# Altium PCB ST-LINK V2-1.PcbDoc
Units mm, origin at the board's own origin, x right, y up, seen from the top; angles counter-clockwise.
Board outline 110.74 x 103.38 mm, 2 copper layers (Top Layer, Bottom Layer); 71 components, 59 nets, 207 pads, 50 vias.
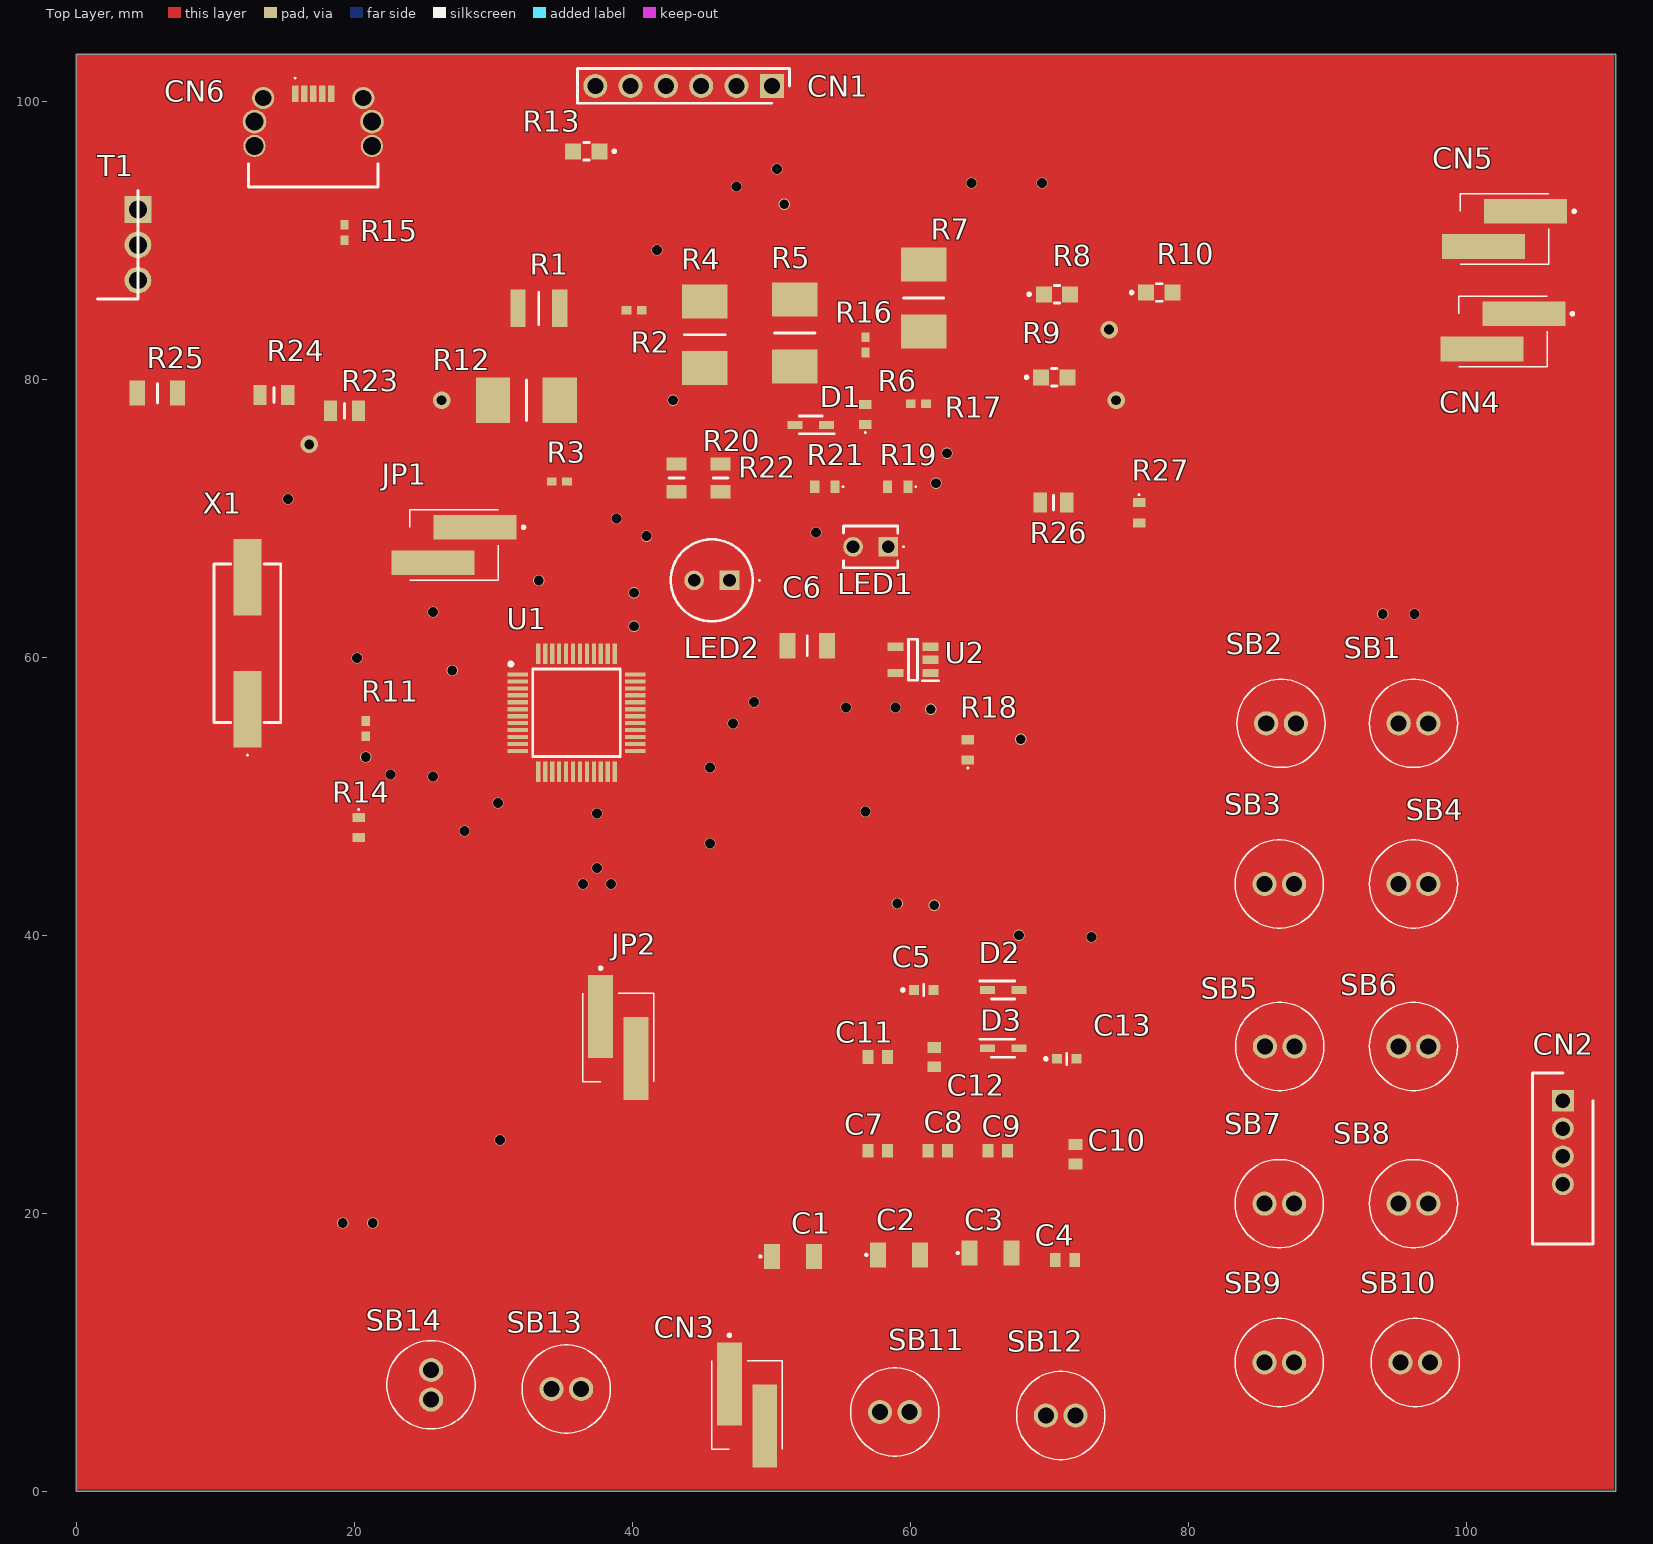
[diagram p0: Top Layer view]
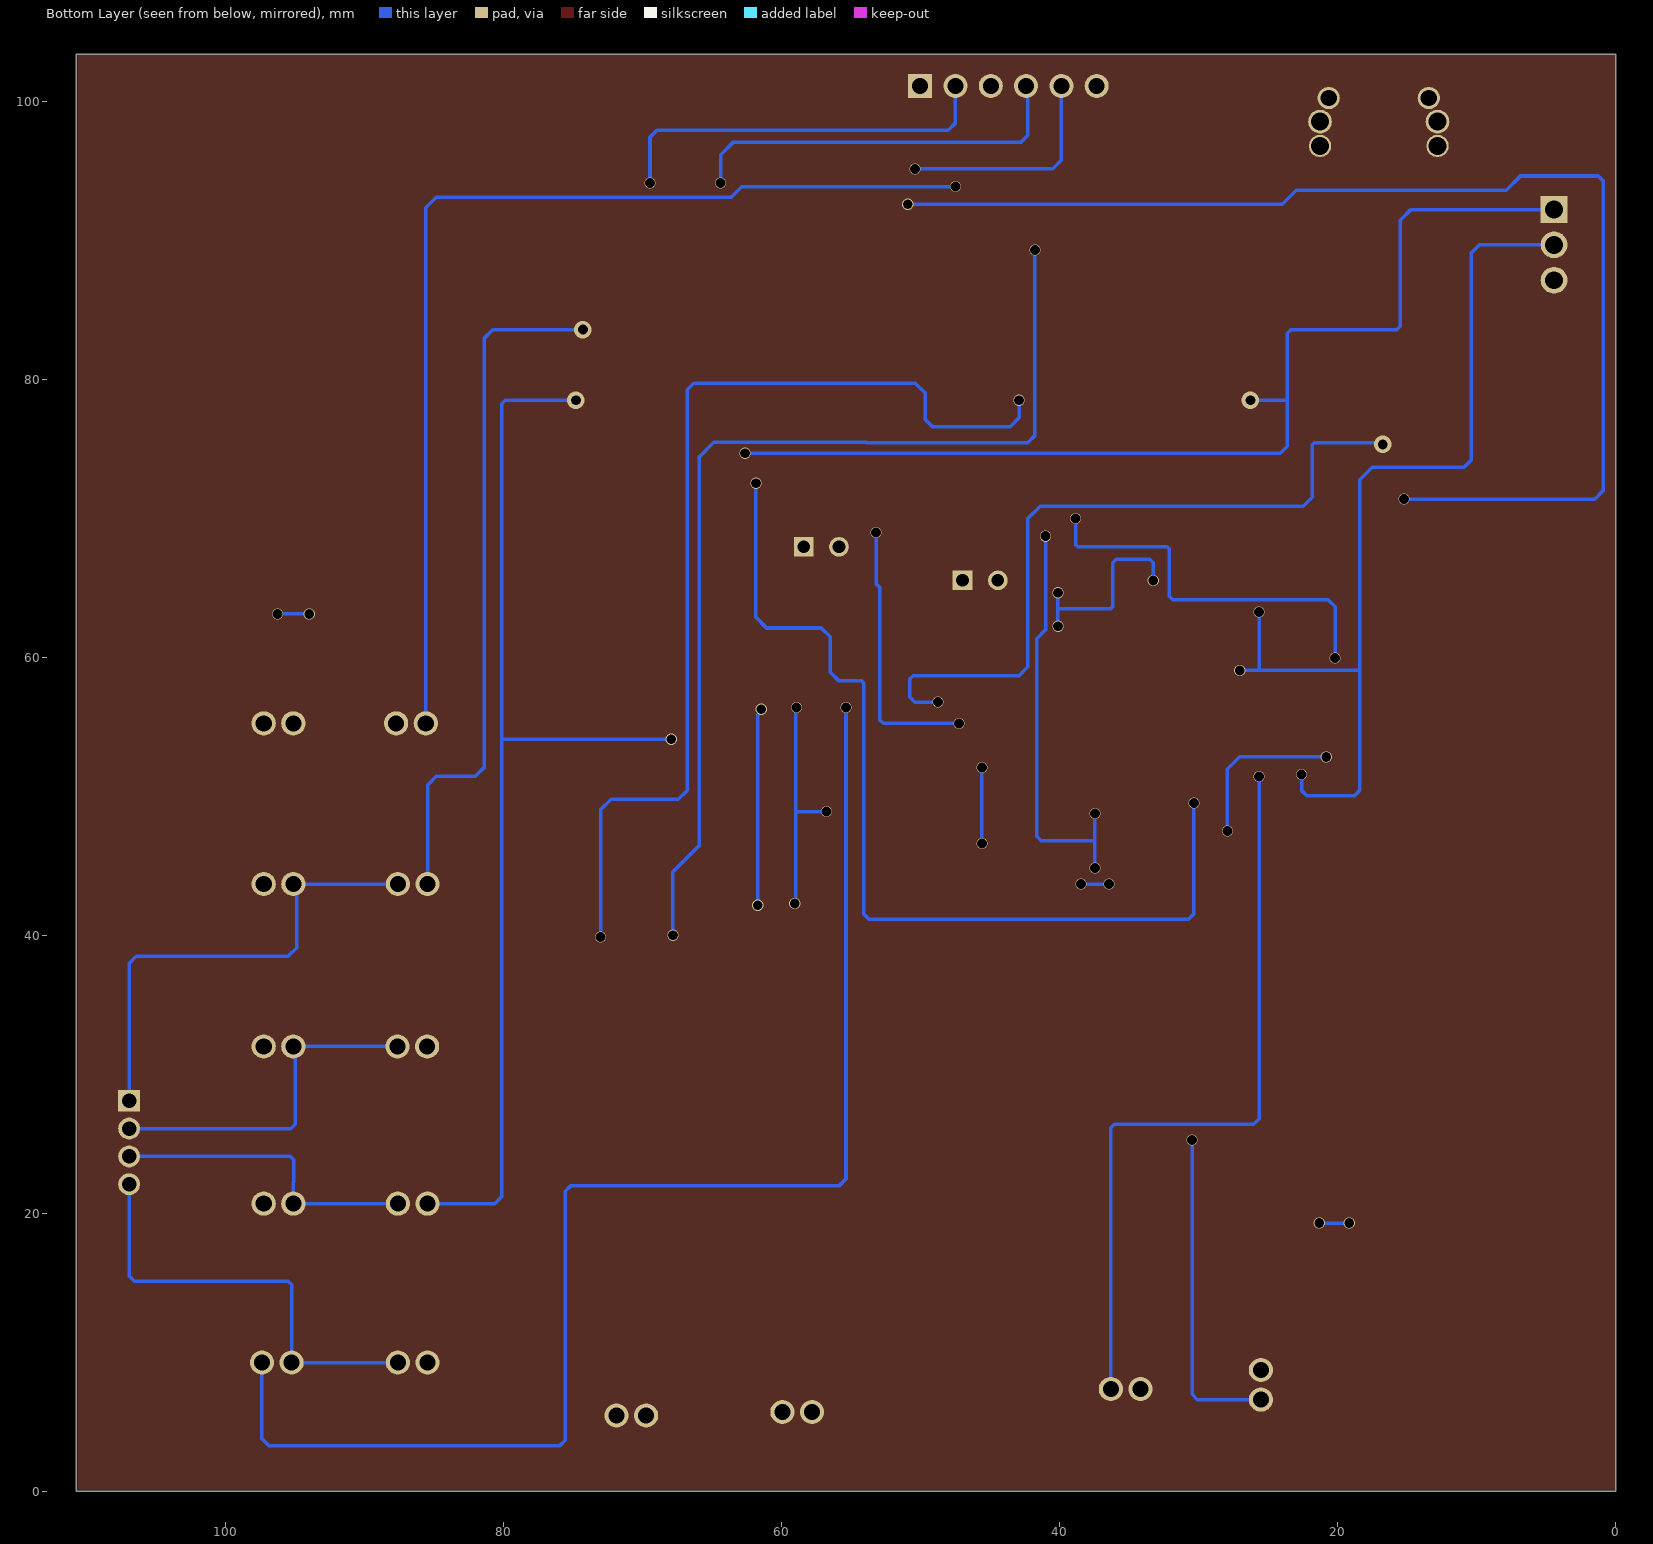
[diagram p1: Bottom Layer view, seen from below]
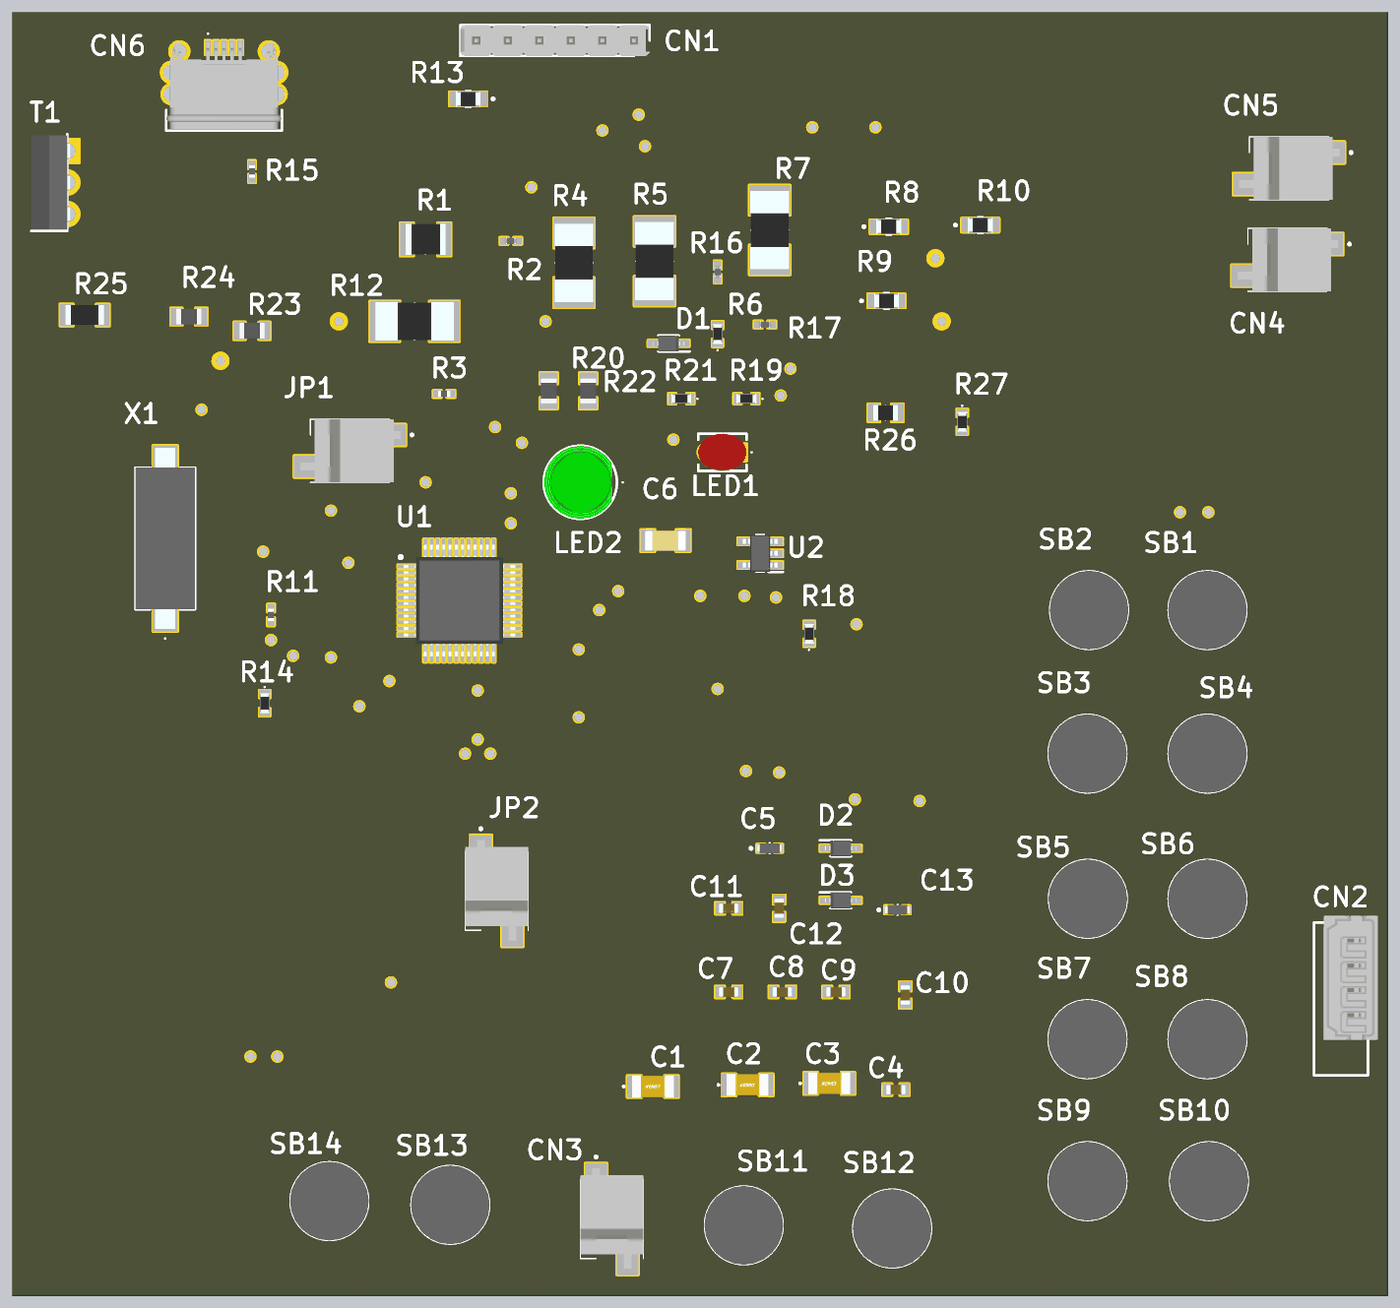
[diagram p2: 3D render of the assembled board from above, using the file's embedded part models]

## Layer stack, top to bottom
Top Solder: solder mask 0.0102, Solder Resist, Dk 3.5
Top Layer: signal copper 0.0356
Dielectric 1: dielectric 0.32, FR-4, Dk 4.8
Bottom Layer: signal copper 0.0356
Bottom Solder: solder mask 0.0102, Solder Resist, Dk 3.5

## Board outline
0,0 0,103.378 110.744,103.378 110.744,0

## Design rules (kind name [scope] priority, off if disabled: settings)
Clearance [All] p1: gap=0.254 ignorepadtopadclearanceinfootprint=FALSE
PolygonConnect [All] p1: connectstyle=Relief reliefconductorwidth=0.254 reliefentries=4 polygonreliefangle="90 Angle" airgapwidth=0.254
RoutingVias [All] p1: holewidth=0.711 width=1.27 viastyle="Through Hole" minholewidth=0.711 minwidth=1.27 maxholewidth=0.711 maxwidth=1.27
SolderMaskExpansion [All] p1: expansion=0.102 istentingtop=FALSE
Width [All] p1: maxlimit=0.254 minlimit=0.254 preferedwidth=0.254
30 further rules are at their usual default settings.

## Components (designator, comment, footprint, x,y, rotation, side; value= is the part's Value field where it differs from the comment)
C1 "C1206C200KCGACTU" C1206 51.562,16.891 r0 top
C2 "C1206C200KCGACTU" C1206 59.182,17.018 r0 top
C3 "C1206C200KCGACTU" C1206 65.762,17.145 r0 top
C4 "06035C104K4T4A" CAPC1608X90N 71.12,16.637 r0 top
C5 "MAJCT168BB7105KTEA01" MAJx16 60.96,36.068 r0 top
C6 "KGM31GCG2J103JU" CAPC3316X145N 52.578,60.833 r0 top
C7 "06035C104K4T4A" CAPC1608X90N 57.658,24.511 r0 top
C8 "06035C104K4T4A" CAPC1608X90N 61.976,24.511 r0 top
C9 "06035C104K4T4A" CAPC1608X90N 66.294,24.511 r0 top
C10 "06035C104K4T4A" CAPC1608X90N 71.882,24.257 r90 top
C11 "06035C104K4T4A" CAPC1608X90N 57.658,31.242 r0 top
C12 "06035C104K4T4A" CAPC1608X90N 61.722,31.242 r90 top
C13 "MAJCT168BB7105KTEA01" MAJx16 71.247,31.115 r0 top
CN1 "22-28-4062" HDRV6W66P0X254_1X6_1524X249X838P 50.038,101.092 r180 top
CN2 "53014-0410" SHDR4W60P0X200_1X4_1200X435X1000P 106.934,28.098 r90 top
CN3 "3-647166-2" 36471662 48.26,6.223 r180 top
CN4 "3-647166-2" 36471662 102.62,83.439 r90 top
CN5 "3-647166-2" 36471662 102.743,90.805 r90 top
CN6 "204926-1103" 2049261103 17.052,97.299 r0 top
D1 "BAT60JFILM" SOD2513X117N 52.832,76.708 r180 top
D2 "BAT60JFILM" SOD2513X117N 66.675,36.068 r0 top
D3 "BAT60JFILM" SOD2513X117N 66.675,31.877 r0 top
JP1 "3-647166-2" 36471662 27.178,68.072 r90 top
JP2 "3-647166-2" 36471662 38.989,32.643 r180 top
LED1 "C4SMA-RGY-CS4V1BB1" C4SMARGYCS4V1BB1 58.42,67.945 r180 top
LED2 "TLHG5420-ASZ" TLHG5420ASZ 46.99,65.532 r0 top
R1 "CRCW12102K70FKEAHP" RESC3225X70N 33.274,85.09 r0 top
R2 "MCS04020D4701BE000" RESC1005X37N 40.132,84.963 r0 top
R3 "SFR01MZPF1003" RESC1005X40N 34.756,72.644 r0 top
R4 "CRM2512QJW-103ELF" RESC6331X80N 45.212,83.198 r270 top
R5 "CRM2512QJW-103ELF" RESC6331X80N 51.689,83.325 r90 top
R6 "ERA-3AED101V" ERA3AEB101V 56.769,77.47 r90 top
R7 "CRM2512QJW-103ELF" RESC6331X80N 60.96,85.839 r90 top
R8 "ERA-6AHD220V" ERA6AEB1020V 70.546,86.106 r0 top
R9 "ERA-6AHD220V" ERA6AEB1020V 70.358,80.137 r0 top
R10 "ERA-6AHD220V" ERA6AEB1020V 77.912,86.233 r0 top
R11 "SFR01MZPF1003" RESC1005X40N 20.828,54.864 r270 top
R12 "CRM2512QJW-103ELF" RESC6331X80N 32.385,78.486 r180 top
R13 "ERA-6AHD220V" ERA6AEB1020V 36.703,96.393 r180 top
R14 "ERA-3AED101V" ERA3AEB101V 20.32,47.752 r270 top
R15 "SFR01MZPF1003" RESC1005X40N 19.304,90.551 r270 top
R16 "MCS04020D4701BE000" RESC1005X37N 56.769,82.465 r270 top
R17 "MCS04020D4701BE000" RESC1005X37N 60.579,78.232 r180 top
R18 "ERA-3AED101V" ERA3AEB101V 64.135,53.34 r90 top
R19 "ERA-3AED101V" ERA3AEB101V 59.092,72.263 r180 top
R20 "WSL080500000ZEA9" RESC2013X84N 43.18,72.898 r90 top
R21 "ERA-3AED101V" ERA3AEB101V 53.848,72.263 r180 top
R22 "WSL080500000ZEA9" RESC2013X84N 46.355,72.898 r90 top
R23 "WSL080500000ZEA9" RESC2013X84N 19.304,77.724 r0 top
R24 "WSL080500000ZEA9" RESC2013X84N 14.224,78.867 r0 top
R25 "CRCW12061K50FKEAHP" RESC3116X65N 5.842,78.994 r180 top
R26 "TNPW080536K0BEEA" RESC2012X55N 70.297,71.12 r0 top
R27 "ERA-3AED101V" ERA3AEB101V 76.454,70.395 r270 top
SB1 "8631CQD2" 8631CQD2 95.123,55.245 r0 top
SB2 "8631CQD2" 8631CQD2 85.598,55.245 r0 top
SB3 "8631CQD2" 8631CQD2 85.471,43.688 r0 top
SB4 "8631CQD2" 8631CQD2 95.123,43.688 r0 top
SB5 "8631CQD2" 8631CQD2 85.5,32.004 r0 top
SB6 "8631CQD2" 8631CQD2 95.123,32.004 r0 top
SB7 "8631CQD2" 8631CQD2 85.471,20.701 r0 top
SB8 "8631CQD2" 8631CQD2 95.123,20.701 r0 top
SB9 "8631CQD2" 8631CQD2 85.471,9.271 r0 top
SB10 "8631CQD2" 8631CQD2 95.25,9.271 r0 top
SB11 "8631CQD2" 8631CQD2 57.814,5.715 r0 top
SB12 "8631CQD2" 8631CQD2 69.752,5.461 r0 top
SB13 "8631CQD2" 8631CQD2 34.192,7.366 r0 top
SB14 "8631CQD2" 8631CQD2 25.527,8.734 r270 top
T1 "BD139" TO254P290X760X1320-3P 4.445,92.202 r270 top
U1 "STM32F103CBT6" QFP50P900X900X160-48N 35.988,56.011 r0 top
U2 "LD3985M33R" SOT95P280X145-5N 60.198,59.817 r180 top
X1 "ECS-80-12-5PX-GM-TR" ECS80125PXGMTR 12.319,61.011 r90 top

## Footprints (in the part's own frame and the unit in brackets; to place one, negate y for a bottom-side part, rotate by r counter-clockwise, add the part's x,y. Pads: shape width x height; smd on the part's side, far side on the other; paste and mask are expansions set on the pad)
8631CQD2 [mm]
  round 1.74 hole 1.16: 1(0,0) 2(2.13,0)
  silkscreen extent -2.11,-3.17 4.24,3.17, body extent -2.11,-3.17 4.24,3.17, height 14.03
36471662 [mm]
  rect 1.78x5.97 smd: 1(1.27,-1.52) 2(-1.27,1.52)
  silkscreen extent -2.54,-5.1 2.54,3.18, body extent -2.54,-4.08 2.54,4, height 10.55
2049261103 [mm]
  rect 0.45x1.2 smd: 1(-1.3,3.225) 2(-0.65,3.225) 3(0,3.225) 4(0.65,3.225) 5(1.3,3.225)
  round 1.6 hole 1.17: MH1(-3.6,2.925) MH2(3.6,2.925)
  round 1.7 hole 1.3: MH3(-4.225,1.225) MH4(4.225,1.225)
  round 1.6 hole 1.3: MH5(-4.225,-0.525) MH6(4.225,-0.525)
  silkscreen extent -4.65,-3.47 4.65,4.4, body extent -4.65,-3.32 4.65,3.68, height 3.83
C4SMARGYCS4V1BB1 [mm]
  rect 1.416x1.416 hole 0.91: 1(0,0)
  round 1.416 hole 0.91: 2(2.54,0)
  silkscreen extent -1.13,-1.5 3.22,1.5, body extent -0.68,-1.5 3.22,1.5, height 10.14
C1206 [mm]
  rect 1.15x1.8 smd: 1(-1.5,0) 2(1.5,0)
  silkscreen extent -2.4,-0.05 -2.3,0.05, body extent -1.7,-0.9 1.7,0.9, height 1.75
CAPC1608X90N [mm]
  rect 0.78x0.99 smd: 1(-0.7,0) 2(0.7,0)
  body extent -0.8,-0.41 0.8,0.41, height 0.9
CAPC3316X145N [mm]
  rect 1.17x1.82 smd: 1(-1.42,0) 2(1.42,0)
  silkscreen extent 0,-0.7 0,0.7, body extent -1.65,-0.8 1.65,0.8, height 1.68
ECS80125PXGMTR [mm]
  rect 5.5x2 smd: 1(-4.75,0) 2(4.75,0)
  silkscreen extent -8.1,-2.4 5.7,2.4, body extent -7.3,-2.4 7.3,2.4, height 4.4
ERA3AEB101V [mm]
  rect 0.65x0.9 smd: 1(-0.725,0) 2(0.725,0)
  silkscreen extent -1.35,-0.05 -1.25,0.05, body extent -0.8,-0.4 0.8,0.4, height 0.45
ERA6AEB1020V [mm]
  rect 1.15x1.15 smd: 1(-0.95,0) 2(0.95,0)
  silkscreen extent -2.1,-0.63 0.2,0.63, body extent -1,-0.63 1,0.63, height 0.5
HDRV6W66P0X254_1X6_1524X249X838P [mm]
  rect 1.725x1.725 hole 1.15: 1(0,0)
  round 1.725 hole 1.15: 2(2.54,0) 3(5.08,0) 4(7.62,0) 5(10.16,0) 6(12.7,0)
  silkscreen extent -1.27,-1.24 13.97,1.24, body extent -1.27,-1.24 13.97,1.24, height 9.65
MAJx16 [mm]
  rect 0.7x0.7 smd: 1(-0.7,0) 2(0.7,0)
  silkscreen extent -1.6,-0.4 0,0.4, body extent -0.98,-0.4 0.98,0.4, height 0.9
QFP50P900X900X160-48N [mm]
  rect 1.475x0.3 smd: 1(-4.238,2.75) 2(-4.238,2.25) 3(-4.238,1.75) 4(-4.238,1.25) 5(-4.238,0.75) 6(-4.238,0.25) 7(-4.238,-0.25) 8(-4.238,-0.75) 9(-4.238,-1.25) 10(-4.238,-1.75) 11(-4.238,-2.25) 12(-4.238,-2.75) 25(4.238,-2.75) 26(4.238,-2.25) 27(4.238,-1.75) 28(4.238,-1.25) 29(4.238,-0.75) 30(4.238,-0.25) 31(4.238,0.25) 32(4.238,0.75) 33(4.238,1.25) 34(4.238,1.75) 35(4.238,2.25) 36(4.238,2.75)
  rect 0.3x1.475 smd: 13(-2.75,-4.238) 14(-2.25,-4.238) 15(-1.75,-4.238) 16(-1.25,-4.238) 17(-0.75,-4.238) 18(-0.25,-4.238) 19(0.25,-4.238) 20(0.75,-4.238) 21(1.25,-4.238) 22(1.75,-4.238) 23(2.25,-4.238) 24(2.75,-4.238) 37(2.75,4.238) 38(2.25,4.238) 39(1.75,4.238) 40(1.25,4.238) 41(0.75,4.238) 42(0.25,4.238) 43(-0.25,4.238) 44(-0.75,4.238) 45(-1.25,4.238) 46(-1.75,4.238) 47(-2.25,4.238) 48(-2.75,4.238)
  silkscreen extent -4.85,-3.15 3.15,3.62, body extent -4.5,-4.5 4.5,4.5, height 1.6
RESC1005X37N [mm]
  rect 0.7x0.6 smd: 1(-0.55,0) 2(0.55,0)
  body extent -0.5,-0.25 0.5,0.25, height 0.32
RESC1005X40N [mm]
  rect 0.7x0.6 smd: 1(-0.55,0) 2(0.55,0)
  body extent -0.5,-0.25 0.5,0.25, height 0.4
RESC2012X55N [mm]
  rect 1x1.45 smd: 1(-0.95,0) 2(0.95,0)
  silkscreen extent 0,-0.53 0,0.53, body extent -1,-0.63 1,0.63, height 0.55
RESC2013X84N [mm]
  rect 0.95x1.45 smd: 1(-1,0) 2(1,0)
  silkscreen extent 0,-0.54 0,0.54, body extent -1.01,-0.64 1.01,0.64, height 0.36
RESC3116X65N [mm]
  rect 1.1x1.8 smd: 1(-1.45,0) 2(1.45,0)
  silkscreen extent 0,-0.7 0,0.7, body extent -1.55,-0.8 1.55,0.8, height 0.65
RESC3225X70N [mm]
  rect 1.1x2.7 smd: 1(-1.5,0) 2(1.5,0)
  silkscreen extent 0,-1.15 0,1.15, body extent -1.6,-1.25 1.6,1.25, height 0.7
RESC6331X80N [mm]
  rect 2.45x3.3 smd: 1(-2.4,0) 2(2.4,0)
  silkscreen extent 0,-1.45 0,1.45, body extent -3.15,-1.55 3.15,1.55, height 0.8
SHDR4W60P0X200_1X4_1200X435X1000P [mm]
  rect 1.575x1.575 hole 1.05: 1(0,0)
  round 1.575 hole 1.05: 2(-2,0) 3(-4,0) 4(-6,0)
  silkscreen extent -10.3,-2.17 2,2.17, body extent -7.45,-2.96 2.55,1.39, height 5.85
SOD2513X117N [mm]
  rect 1.085x0.55 smd: 1(-1.14,0) 2(1.14,0)
  silkscreen extent -1.68,-0.64 0.83,0.64, body extent -1.25,-0.64 1.25,0.64, height 1.17
SOT95P280X145-5N [mm]
  rect 1.15x0.6 smd: 1(-1.25,0.95) 2(-1.25,0) 3(-1.25,-0.95) 4(1.25,-0.95) 5(1.25,0.95)
  silkscreen extent -1.83,-1.48 0.33,1.5, body extent -1.4,-1.48 1.4,1.48, height 1.45
TLHG5420ASZ [mm]
  rect 1.416x1.416 hole 0.91: 1(0,0)
  round 1.416 hole 0.91: 2(-2.54,0)
  silkscreen extent -4.22,-2.95 2.2,2.95, body extent -4.19,-2.95 1.26,2.95, height 13.24
TO254P290X760X1320-3P [mm]
  rect 1.92x1.92 hole 1.28: 1(0,0)
  round 1.92 hole 1.28: 2(2.54,0) 3(5.08,0)
  silkscreen extent -1.36,-2.9 6.44,0, body extent -1.26,-2.9 6.34,0.26, height 12.93

## Part data
C1 C2 C3: "Capacitor", Manufacturer_Name=KEMET, Datasheet Link=https://content.kemet.com/datasheets/KEM_C1009_C0G_HV_SMD.pdf, Manufacturer_Part_Number=C1206C200KCGACTU
C4 C7 C8 C9 C10 C11 C12: "Capacitor", Manufacturer_Name="Kyocera AVX", Mouser Part Number=581-06035C104K4T4A, Arrow Part Number=06035C104K4T4A, Arrow Price/Stock=https://www.arrow.com/en/products/06035c104k4t4a/avx, Datasheet Link=https://componentsearchengine.com/Datasheets/1/06031A100FAT2A.pdf, Height=0.9mm, Manufacturer_Part_Number=06035C104K4T4A, Mouser Price/Stock=https://www.mouser.co.uk/ProductDetail/KYOCERA-AVX/06035C104K4T4A?qs=NBj5Hwer2CEXBYKT%252BbuSBA%3D%3D
C5 C13: "Capacitor", Manufacturer_Name="TAIYO YUDEN", Datasheet Link=https://ds.yuden.co.jp/TYCOMPAS/or/detail?pn=MAJCT168BB7105KTEA01, Height=0.8mm, Manufacturer_Part_Number=MAJCT168BB7105KTEA01
C6: "Capacitor", Manufacturer_Name="Kyocera AVX", Mouser Part Number=581-KGM31GCG2J103JU, Datasheet Link=https://datasheets.kyocera-avx.com/HVKGM.pdf, Height=1.45mm, Manufacturer_Part_Number=KGM31GCG2J103JU, Mouser Price/Stock=https://www.mouser.co.uk/ProductDetail/KYOCERA-AVX/KGM31GCG2J103JU?qs=63Lh8XYXgjt6ivbLeGkCxg%3D%3D
CN1: "Connector", Manufacturer_Name=Molex, Mouser Part Number=538-22-28-4062, Datasheet Link=https://datasheet.datasheetarchive.com/originals/distributors/SFDatasheet-1/sf-00031037.pdf, Height=8.38mm, Manufacturer_Part_Number=22-28-4062, Mouser Price/Stock=https://www.mouser.com/Search/Refine.aspx?Keyword=538-22-28-4062
CN2: "Connector", Manufacturer_Name=Molex, Mouser Part Number=538-53014-0410, Datasheet Link=https://www.molex.com/pdm_docs/sd/530140410_sd.pdf, Height=10mm, Manufacturer_Part_Number=53014-0410, Mouser Price/Stock=https://www.mouser.co.uk/ProductDetail/Molex/53014-0410?qs=TLs3Kb%252BkMqKk8s1WRHwRGw%3D%3D
CN3 CN4 CN5 JP1 JP2: "Connector", Manufacturer_Name="TE Connectivity", Mouser Part Number=571-3-647166-2, Arrow Part Number=3-647166-2, Arrow Price/Stock=https://www.arrow.com/en/products/3-647166-2/te-connectivity?region=nac, Datasheet Link=https://www.te.com/commerce/DocumentDelivery/DDEController?Action=showdoc&DocId=Customer+Drawing%7F647166%7FR1%7Fpdf%7FEnglish%7FENG_CD_647166_R1.pdf%7F3-647166-2, Height=10.66mm, Manufacturer_Part_Number=3-647166-2, Mouser Price/Stock=https://www.mouser.co.uk/ProductDetail/TE-Connectivity/3-647166-2?qs=xsTFCgGnzbJU1qz6Np9kzA%3D%3D
CN6: "Connector", Manufacturer_Name=Molex, Mouser Part Number=538-204926-1103, Arrow Part Number=204926-1103, Arrow Price/Stock=https://www.arrow.com/en/products/204926-1103/molex?region=nac, Datasheet Link=https://www.molex.com/content/dam/molex/molex-dot-com/products/automated/en-us/salesdrawingpdf/204/204926/2049261103_sd.pdf, Height=4.65mm, Manufacturer_Part_Number=204926-1103, Mouser Price/Stock=https://www.mouser.co.uk/ProductDetail/Molex/204926-1103?qs=55YtniHzbhBOQihiQOeiLg%3D%3D
D1 D2 D3: "Schottky Diode", Manufacturer_Name=STMicroelectronics, Mouser Part Number=511-BAT60JFILM, Arrow Part Number=BAT60JFILM, Arrow Price/Stock=https://www.arrow.com/en/products/bat60jfilm/stmicroelectronics?region=nac, Datasheet Link=https://www.mouser.jp/datasheet/2/389/cd00001944-1795661.pdf, Height=1.17mm, Manufacturer_Part_Number=BAT60JFILM, Mouser Price/Stock=https://www.mouser.co.uk/ProductDetail/STMicroelectronics/BAT60JFILM?qs=GnFZssByvVVVnMaukcyLZg%3D%3D
LED1: "LED", Manufacturer_Name="CREE LED", Mouser Part Number=941-C4SMARGYCS4V1BB1, Arrow Part Number=C4SMA-RGY-CS4V1BB1, Arrow Price/Stock=https://www.arrow.com/en/products/c4sma-rgy-cs4v1bb1/cree-led?region=nac, Datasheet Link=https://cree-led.com/media/documents/C4SMA-1442.pdf, Height=8.8mm, Manufacturer_Part_Number=C4SMA-RGY-CS4V1BB1, Mouser Price/Stock=https://www.mouser.co.uk/ProductDetail/Cree-LED/C4SMA-RGY-CS4V1BB1?qs=7D1LtPJG0i08%2Fw1qRIcnyw%3D%3D
LED2: "LED", Manufacturer_Name=Vishay, Mouser Part Number=78-TLHG5420-ASZ, Datasheet Link=https://www.vishay.com/docs/86335/tlhg542_tlhg642.pdf, Height=12.8mm, Manufacturer_Part_Number=TLHG5420-ASZ, Mouser Price/Stock=https://www.mouser.co.uk/ProductDetail/Vishay-Siliconix/TLHG5420-ASZ?qs=M%2FWrVUahkW9Iv5EBNpgqMA%3D%3D
R1: "Resistor", Manufacturer_Name=Vishay, Mouser Part Number=71-CRCW12102K70FKEAH, Datasheet Link=http://componentsearchengine.com/Datasheets/1/CRCW12102K70FKEAHP.pdf, Height=0.7mm, Manufacturer_Part_Number=CRCW12102K70FKEAHP, Mouser Price/Stock=https://www.mouser.co.uk/ProductDetail/Vishay-Dale/CRCW12102K70FKEAHP?qs=OAzHGkhREL0m0%252BU1n6AaAg%3D%3D
R2 R16 R17: "Resistor", Manufacturer_Name=Vishay, Mouser Part Number=594-MCS04020D4701BE0, Datasheet Link=http://www.vishay.com/docs/28705/mcx0x0xpro.pdf, Height=0.37mm, Manufacturer_Part_Number=MCS04020D4701BE000, Mouser Price/Stock=https://www.mouser.co.uk/ProductDetail/Vishay-Beyschlag/MCS04020D4701BE000?qs=ft9OtscSA3%252BR0DpF5QqL2Q%3D%3D
R3 R11 R15: "Resistor", Manufacturer_Name="ROHM Semiconductor", Mouser Part Number=755-SFR01MZPF1003, Datasheet Link=https://fscdn.rohm.com/en/products/databook/datasheet/passive/resistor/chip_resistor/sfr-e.pdf, Height=0.4mm, Manufacturer_Part_Number=SFR01MZPF1003, Mouser Price/Stock=https://www.mouser.co.uk/ProductDetail/ROHM-Semiconductor/SFR01MZPF1003?qs=Mv7BduZupUj2RFL5gMaKTg%3D%3D
R4 R5 R7 R12: "Resistor", Manufacturer_Name=Bourns, Mouser Part Number=652-CRM2512QJW-103E, Arrow Part Number=CRM2512QJW-103ELF, Arrow Price/Stock=https://www.arrow.com/en/products/crm2512qjw-103elf/bourns?region=nac, Datasheet Link=http://www.bourns.com/data/global/pdfs/CRM0805_1206_2010.pdf, Height=0.8mm, Manufacturer_Part_Number=CRM2512QJW-103ELF, Mouser Price/Stock=https://www.mouser.co.uk/ProductDetail/Bourns/CRM2512QJW-103ELF?qs=8Wlm6%252BaMh8Rzg3bRHdWGsA%3D%3D
R6 R14 R18 R19 R21 R27: "Resistor", Manufacturer_Name=Panasonic, Mouser Part Number=667-ERA-3AED101V, Arrow Part Number=ERA-3AED101V, Arrow Price/Stock=https://www.arrow.com/en/products/era-3aed101v/panasonic, Datasheet Link=https://industrial.panasonic.com/cdbs/www-data/pdf/RDM0000/AOA0000C307.pdf, Height=0.55mm, Manufacturer_Part_Number=ERA-3AED101V, Mouser Price/Stock=https://www.mouser.co.uk/ProductDetail/Panasonic/ERA-3AED101V?qs=MNPzkKEzRtTdzGewEn1kig%3D%3D
R8 R9 R10 R13: "Resistor", Manufacturer_Name=Panasonic, Mouser Part Number=667-ERA-6AHD220V, Datasheet Link=https://industrial.panasonic.com/cdbs/www-data/pdf/RDM0000/AOA0000C307.pdf, Height=0.6mm, Manufacturer_Part_Number=ERA-6AHD220V, Mouser Price/Stock=https://www.mouser.co.uk/ProductDetail/Panasonic/ERA-6AHD220V/?qs=MNPzkKEzRtQTWqg2JSKn2A%3D%3D
R20 R22 R23 R24: "Resistor", Manufacturer_Name=Vishay, Mouser Part Number=71-WSL080500000ZEA9, Arrow Part Number=WSL080500000ZEA9, Arrow Price/Stock=https://www.arrow.com/en/products/wsl080500000zea9/vishay?region=nac, Datasheet Link=https://ad.componentsearchengine.com/Datasheets/2/WSL080500000ZEA9.pdf, Height=0.838mm, Manufacturer_Part_Number=WSL080500000ZEA9, Mouser Price/Stock=https://www.mouser.co.uk/ProductDetail/Vishay-Dale/WSL080500000ZEA9?qs=f1l5vAGoKgsImKS87N8TmQ%3D%3D
R25: "Resistor", Manufacturer_Name=Vishay, Mouser Part Number=71-CRCW12061K50FKEAH, Arrow Part Number=CRCW12061K50FKEAHP, Arrow Price/Stock=https://www.arrow.com/en/products/crcw12061k50fkeahp/vishay?region=nac, Datasheet Link=http://componentsearchengine.com/Datasheets/1/CRCW12061K50FKEAHP.pdf, Height=0.65mm, Manufacturer_Part_Number=CRCW12061K50FKEAHP, Mouser Price/Stock=https://www.mouser.co.uk/ProductDetail/Vishay-Dale/CRCW12061K50FKEAHP?qs=k2%2FDWSARqgEwHXAQbL4aEg%3D%3D
R26: "Resistor", Manufacturer_Name=Vishay, Datasheet Link=https://www.vishay.com/docs/31006/tnpw.pdf, Height=0.55mm, Manufacturer_Part_Number=TNPW080536K0BEEA
SB1 SB2 SB3 SB4 SB5 SB6 SB7 SB8 SB9 SB10 SB11 SB12 SB13 SB14: "Switch (2-Pin Push)", Manufacturer_Name="C & K COMPONENTS", Mouser Part Number=611-8631-261, Datasheet Link=https://www.ckswitches.com/media/1396/8600.pdf, Height=13.93mm, Manufacturer_Part_Number=8631CQD2, Mouser Price/Stock=https://www.mouser.co.uk/ProductDetail/CK/8631CQD2?qs=ktcBc77oICXe9iPhfEwnkA%3D%3D
T1: "Transistor BJT NPN", Manufacturer_Name=STMicroelectronics, Mouser Part Number=511-BD139, Arrow Part Number=BD139, Arrow Price/Stock=https://www.arrow.com/en/products/bd139/stmicroelectronics?region=europe, Datasheet Link=http://www.st.com/web/en/resource/technical/document/datasheet/CD00001225.pdf, Height=2.9mm, Manufacturer_Part_Number=BD139, Mouser Price/Stock=https://www.mouser.co.uk/ProductDetail/STMicroelectronics/BD139?qs=ljbEvF4DwOPW%2FLxHSWYMMA%3D%3D
U1: "Integrated Circuit", Manufacturer_Name=STMicroelectronics, Mouser Part Number=511-STM32F103CBT6, Arrow Part Number=STM32F103CBT6, Arrow Price/Stock=https://www.arrow.com/en/products/stm32f103cbt6/stmicroelectronics?region=europe, Datasheet Link=http://www.st.com/st-web-ui/static/active/en/resource/technical/document/datasheet/CD00161566.pdf, Height=1.6mm, Manufacturer_Part_Number=STM32F103CBT6, Mouser Price/Stock=https://www.mouser.co.uk/ProductDetail/STMicroelectronics/STM32F103CBT6?qs=WxFF5lh7QM3goh6GV5Ogig%3D%3D
U2: "Integrated Circuit", Manufacturer_Name=STMicroelectronics, Mouser Part Number=511-LD3985M33R, Arrow Part Number=LD3985M33R, Arrow Price/Stock=https://www.arrow.com/en/products/ld3985m33r/stmicroelectronics?region=europe, Datasheet Link=http://www.st.com/st-web-ui/static/active/en/resource/technical/document/datasheet/CD00003395.pdf, Height=1.45mm, Manufacturer_Part_Number=LD3985M33R, Mouser Price/Stock=https://www.mouser.co.uk/ProductDetail/STMicroelectronics/LD3985M33R?qs=22WmWNTp1rrPOccVv4HZ7A%3D%3D
X1: "Crystal or Oscillator", Manufacturer_Name=ECS, Mouser Part Number=520-80-12-5PX-GM-TR, Datasheet Link=https://ecsxtal.com/store/pdf/csm-7x.pdf, Height=4.3mm, Manufacturer_Part_Number=ECS-80-12-5PX-GM-TR, Mouser Price/Stock=https://www.mouser.co.uk/ProductDetail/ECS/ECS-80-12-5PX-GM-TR?qs=amGC7iS6iy%252BwzUdIY7WpOA%3D%3D

## Via types
v1: diameter 0.8, hole 0.711, Top Layer to Bottom Layer, 46 vias
v2: diameter 1.27, hole 0.711, Top Layer to Bottom Layer, 4 vias

## Nets (pads, with @x,y where several pads share a name; then routed paths per layer and width w, separated by ;. In a path a pad name is that pad's centre, name@x,y a point inside that pad or via, vN(x,y) a via of type N, cw(c..) or ccw(c..) an arc to the next point about the centre after c; other vN are vias at no path point)
+3V3: R16.1
+3V3_ST_LINK: C7.2 C8.2 C9.2 C10.2 C11.2 C13.2 JP1.2 R11.2 R20.2 R22.2 SB4.2 T1.2 U1.1 U1.9 U1.24 U1.36 U1.48 U2.5 | length 279.7
  Top Layer w0.254: R11.2 20.828,54.364 21.001,54.537 21.14,54.537 21.36,54.757 22.606,54.757 ; v1(22.606,51.562) 22.606,54.757 ; v1(25.654,63.246) 25.654,64.262 ; JP1.2 25.654,66.798 25.654,64.262 ; v1(27.051,59.055) 31.623,59.055 U1.1@31.877,58.801 ; U1.9@31.957,54.757 22.606,54.757 ; U1.48@33.238,60.138 33.238,64.135 ; v1(33.274,65.532) 33.238,65.496 33.238,64.135 ; U1.24 38.738,49.527 39.37,48.895 v1(56.769,48.895) ; v1(40.132,62.23) 40.132,60.96 40.386,60.706 40.386,58.681 58.351,58.681 58.364,58.694 58.5,58.694 58.673,58.867 U2.5 ; v1(40.132,64.643) 40.132,73.533 40.497,73.898 R20.2 R22.2 ; v1(58.928,56.388) U2.5@58.928,58.847 ; v1(59.055,42.291) 58.951,42.187 58.951,41.298 58.358,40.705 C11.2 C7.2 58.358,22.922 58.674,22.606 62.23,22.606 62.676,23.052 C8.2 63.669,24.511 63.817,24.362 63.817,22.924 64.135,22.606 66.845,22.606 66.994,22.755 C9.2 68.707,24.511 69.215,25.019 C10.2@71.882,25.019 ; C10.2 71.947,25.022 C13.2 71.882,31.18 71.882,37.084 72.39,37.592 96.774,37.592 97.253,38.071 SB4.2 ; 25.654,64.262 33.111,64.262 33.238,64.135
  Bottom Layer w0.254: T1.2 9.779,89.662 9.801,89.684 10.414,89.071 10.414,74.168 10.922,73.66 17.526,73.66 18.415,72.771 18.415,59.055 ; v1(22.606,51.562) 22.606,50.419 22.225,50.038 18.796,50.038 18.415,50.419 18.415,59.055 ; v1(25.654,63.246) 25.654,59.055 ; v1(27.051,59.055) 25.654,59.055 ; v1(33.274,65.532) 33.274,66.802 33.528,67.056 35.941,67.056 36.195,66.802 36.195,63.649 36.344,63.5 40.069,63.5 40.132,63.436 ; v1(40.132,62.23) 40.132,63.436 ; v1(40.132,64.643) 40.132,63.436 ; v1(56.769,48.895) 58.991,48.895 ; v1(58.928,56.388) 58.991,56.325 58.991,48.895 ; v1(59.055,42.291) 58.991,42.355 58.991,48.895 ; 18.415,59.055 25.654,59.055
AIN_1: R6.2 R16.2 R17.2 U1.10 | length 101.6
  Top Layer w0.254: v1(30.353,49.53) 30.334,49.549 30.334,50.27 30.185,50.419 24.638,50.419 24.257,50.8 24.257,53.741 24.765,54.249 U1.10@31.957,54.249 ; R16.2 R6.2 56.787,78.213 60.01,78.213 R17.2 60.029,76.75 60.452,76.327 61.595,76.327 61.849,76.073 v1(61.849,72.517)
  Bottom Layer w0.254: v1(30.353,49.53) 30.353,41.529 30.734,41.148 53.721,41.148 54.102,41.529 54.102,58.144 54.251,58.293 55.88,58.293 56.515,58.928 56.515,61.468 57.15,62.103 61.087,62.103 61.849,62.865 v1(61.849,72.517)
E5V: D2.2 R1.1 | length 94.6
  Top Layer w0.254: R1.1 31.774,90.783 31.923,90.932 41.634,90.932 41.783,90.783 v1(41.783,89.281) ; D2.2 67.818,36.071 v1(67.818,40.005)
  Bottom Layer w0.254: v1(41.783,89.281) 41.783,75.946 42.291,75.438 53.893,75.438 53.912,75.457 64.878,75.457 65.913,74.422 65.913,46.482 67.818,44.577 v1(67.818,40.005)
GND: C1.2 C2.2 C3.2 C4.1 C5.1 C6.1 C7.1 C8.1 C9.1 C10.1 C11.1 C12.1 C13.1 CN1.3 CN4.1 CN4.2 CN5.1 CN5.2 CN6.5 CN6.MH1 CN6.MH2 CN6.MH3 CN6.MH4 CN6.MH5 CN6.MH6 JP2.2 LED1.2 R2.2 R3.1 R4.1 R5.2 R7.1 R15.2 R17.1 R26.1 SB8.2 SB12.1 U1.8 U1.20 U1.23 U1.35 U1.47
LED_STLINK: R19.1 R21.1 U1.30 | length 38.2
  Top Layer w0.254: U1.30@40.433,55.757 41.371,55.757 ; 41.371,55.749 41.875,55.245 v1(47.244,55.245) ; v1(53.213,68.961) 53.213,70.358 53.467,70.612 54.334,70.612 54.573,70.851 R21.1 54.573,73.22 54.886,73.533 59.563,73.533 59.817,73.279 R19.1
  Bottom Layer w0.254: v1(47.244,55.245) 52.705,55.245 52.959,55.499 52.959,65.024 53.213,65.278 v1(53.213,68.961)
MCO: SB11.2
NetC3_1: C3.1 R14.2 SB11.1 | length 88.3
  Top Layer w0.254: R14.2 20.32,14.097 20.955,13.462 57.785,13.462 ; SB11.1 57.814,13.433 57.785,13.462 ; C3.1 64.262,13.97 63.754,13.462 57.785,13.462
NetC4_2: C4.2 R11.1 SB12.2 U1.7 | length 114.2
  Top Layer w0.254: v1(20.828,52.832) 19.177,52.832 18.796,53.213 18.796,55.118 19.092,55.414 R11.1 21.717,55.414 22.052,55.749 31.241,55.749 31.249,55.757 U1.7@31.957,55.757 ; v1(27.94,47.498) 27.94,22.733 28.448,22.225 52.959,22.225 54.229,20.955 71.501,20.955 71.82,20.636 C4.2 71.882,16.575 SB12.2
  Bottom Layer w0.254: v1(20.828,52.832) 27.051,52.832 27.94,51.943 v1(27.94,47.498)
NetC5_2: C5.2 C12.2 D2.1 D3.1 U2.1 U2.2 U2.3 | length 36.7
  Top Layer w0.254: U2.3 U2.2 U2.1 61.468,58.847 v1(61.468,56.261) ; v1(61.722,42.164) 61.691,42.133 61.691,36.099 C5.2 ; D3.1 61.787,31.877 C12.2 61.66,32.004 C5.2 ; D2.1 C5.2
  Bottom Layer w0.254: v1(61.468,56.261) 61.468,56.113 61.722,55.859 v1(61.722,42.164)
NetC6_2: C6.2 U2.4 | length 5
  Top Layer w0.254: C6.2 54.064,60.767 U2.4
NetCN1_1: CN1.1 D1.2 R5.1 | length 27.4
  Top Layer w0.254: CN1.1 50.038,97.155 48.895,96.012 48.895,81.407 49.377,80.925 R5.1 51.692,80.922 D1.2
NetCN1_2: CN1.2 R8.1 | length 36.4
  Top Layer w0.254: v1(69.469,94.107) 69.469,86.233 R8.1
  Bottom Layer w0.254: CN1.2 47.498,98.425 48.006,97.917 68.961,97.917 69.469,97.409 v1(69.469,94.107)
NetCN1_4: CN1.4 R9.1 | length 47
  Top Layer w0.254: v1(64.389,94.107) 64.389,80.645 64.897,80.137 R9.1
  Bottom Layer w0.254: CN1.4 42.291,100.965 42.291,97.536 42.799,97.028 63.5,97.028 64.389,96.139 v1(64.389,94.107)
NetCN1_5: CN1.5 R10.1 | length 51.3
  Top Layer w0.254: v1(50.419,95.123) 50.441,95.145 76.432,95.145 76.962,94.615 R10.1
  Bottom Layer w0.254: CN1.5 39.878,95.758 40.513,95.123 v1(50.419,95.123)
NetCN1_6: CN1.6 R13.1 | length 4.8
  Top Layer w0.254: CN1.6 37.338,96.708 R13.1
NetCN2_1: CN2.1 SB3.2 SB4.1 | length 34.6
  Bottom Layer w0.254: SB3.2 SB4.1 94.869,43.434 94.869,39.116 95.504,38.481 106.426,38.481 106.934,37.973 CN2.1
NetCN2_2: CN2.2 SB5.2 SB6.1 | length 25.2
  Bottom Layer w0.254: SB5.2 SB6.1 94.996,31.877 94.996,26.416 95.314,26.098 CN2.2
NetCN2_3: CN2.3 SB7.2 SB8.1 | length 23
  Top Layer w0.254: SB8.1 SB8.1@95.377,20.955
  Bottom Layer w0.254: SB7.2 SB8.1 95.123,22.229 95.101,22.251 95.101,23.854 95.345,24.098 CN2.3
NetCN2_4: CN2.4 SB9.2 SB10.1 | length 31.8
  Bottom Layer w0.254: SB9.2 SB10.1 95.25,14.859 95.504,15.113 106.553,15.113 106.934,15.494 CN2.4
NetCN6_2: CN6.2 R24.1 | length 24.3
  Top Layer w0.254: R24.1 13.224,91.964 13.702,92.442 15.988,92.442 16.402,92.856 CN6.2
NetCN6_3: CN6.3 R23.1 R25.1 | length 41.1
  Top Layer w0.254: R25.1 7.292,77.671 7.62,77.343 13.843,77.343 14.224,77.724 14.224,80.264 14.605,80.645 16.129,80.645 16.383,80.391 16.383,78.232 16.891,77.724 R23.1 18.304,86.471 17.052,87.723 CN6.3
NetCN6_4: CN6.4 R15.1 | length 10.9
  Top Layer w0.254: CN6.4 17.702,91.391 17.992,91.101 R15.1
NetD1_1: D1.1 R6.1 | length 2.8
  Top Layer w0.254: D1.1 53.99,76.726 56.75,76.726 R6.1
NetJP1_1: JP1.1 R1.2 R2.1 U1.39 | length 43.8
  Top Layer w0.254: JP1.1 28.698,73.402 29.21,73.914 37.846,73.914 37.846,61.172 37.738,61.064 U1.39 U1.39@37.738,60.138 ; R1.2 34.901,84.963 R2.1 39.582,83.016 37.945,81.379 37.945,73.914
NetJP2_1: JP2.1 R20.1 U1.21 | length 49.2
  Top Layer w0.254: U1.21 37.238,49.757 37.446,49.549 v1@37.446,48.916 ; v1(37.465,44.831) 37.465,34.417 JP2.1 ; v1(37.465,48.768) v1@37.465,48.916 ; v1(41.021,68.707) 41.021,69.701 41.17,69.85 43.031,69.85 43.18,69.999 R20.1
  Bottom Layer w0.254: v1(37.465,44.831) 37.465,46.799 ; v1(37.465,48.768) 37.465,46.799 ; v1(41.021,68.707) 41.021,61.976 41.656,61.341 41.656,47.117 41.338,46.799 37.465,46.799
NetLED1_1: LED1.1 R19.2 | length 4.3
  Top Layer w0.254: R19.2 58.367,67.998 LED1.1
NetLED2_1: LED2.1 R21.2 | length 12.1
  Top Layer w0.254: LED2.1 49.276,65.532 49.911,66.167 49.911,71.628 50.546,72.263 R21.2
NetLED2_2: LED2.2 R22.1 | length 7.2
  Top Layer w0.254: LED2.2 44.45,68.58 46.228,70.358 46.228,71.771 R22.1
NetR3_2: R3.2 U1.44 | length 12.5
  Top Layer w0.254: U1.44@35.238,60.138 35.238,61.064 35.306,61.132 35.306,61.31 R3.2
NetR4_2: R4.2 U1.2 | length 57.7
  Top Layer w0.254: v1(20.193,59.944) 20.193,58.547 20.475,58.265 U1.2@31.75,58.265 ; v1(38.862,69.977) 38.862,75.692 39.37,76.2 44.577,76.2 45.212,76.835 R4.2
  Bottom Layer w0.254: v1(20.193,59.944) 20.193,63.627 20.701,64.135 31.877,64.135 32.131,64.389 32.131,67.796 32.28,67.945 38.713,67.945 38.862,68.094 v1(38.862,69.977)
NetR7_2: R7.2 U1.3 | length 131.4
  Top Layer w0.254: v1(15.24,71.374) 17.653,71.374 18.161,70.866 18.161,58.928 19.332,57.757 U1.3@31.957,57.757 ; v1(50.927,92.583) 60.579,92.583 60.96,92.202 R7.2
  Bottom Layer w0.254: v1(15.24,71.374) 1.524,71.374 0.889,72.009 0.889,94.234 1.27,94.615 6.858,94.615 7.874,93.599 22.987,93.599 24.003,92.583 v1(50.927,92.583)
NetR12_2: R12.2 R26.2 R27.1 T1.1 | length 98.3
  Top Layer w0.254: v2(26.289,78.486) R12.2 ; v1(62.63,74.676) 70.993,74.676 71.247,74.422 R26.2 R27.1
  Bottom Layer w0.254: T1.1 14.732,92.202 15.494,91.44 15.494,83.82 15.748,83.566 23.368,83.566 23.622,83.312 23.622,78.486 ; v2(26.289,78.486) 23.622,78.486 ; v1(62.63,74.676) 24.13,74.676 23.622,75.184 23.622,78.486
NetR14_1: R14.1 U1.29 | length 25.8
  Top Layer w0.254: R14.1@20.066,48.514 31.369,48.514 32.131,49.276 32.131,50.533 32.124,50.54 32.124,51.874 33.076,52.826 33.076,54.793 33.528,55.245 U1.29@40.433,55.245
NetR25_2: R25.2 T1.3 | length 8.1
  Top Layer w0.254: R25.2 4.445,79.047 T1.3
NetSB1_2: SB1.2
NetSB2_2: SB2.2
NetSB5_1: SB5.1
NetSB9_1: SB9.1
NetSB13_1: SB13.1
NetSB14_1: SB14.1
NetU1_28: U1.28
"OSC IN": C2.1 U1.5 X1.2 | length 131.5
  Top Layer w0.254: X1.2 17.043,65.761 17.399,65.405 17.399,60.452 ; v1(19.177,19.304) 18.034,19.304 17.78,19.558 17.78,46.355 17.145,46.99 9.144,46.99 8.636,47.498 8.636,59.817 9.271,60.452 17.399,60.452 ; v1(21.336,19.304) 46.482,19.304 46.99,18.796 46.99,15.113 47.498,14.605 57.15,14.605 57.682,15.137 C2.1 ; U1.5@31.496,56.769 18.161,56.769 17.399,57.531 17.399,60.452
  Bottom Layer w0.254: v1(19.177,19.304) v1(21.336,19.304)
"OSC OUT": C1.1 U1.6 X1.1 | length 89.5
  Top Layer w0.254: X1.1 17.78,56.261 ; U1.6@31.369,56.261 17.78,56.261 ; C1.1 50.062,20.042 49.53,20.574 23.241,20.574 22.733,21.082 22.733,47.244 22.225,47.752 18.288,47.752 17.78,48.26 17.78,56.261
STLINK_RX: CN3.2 SB14.2 U1.13 | length 80.5
  Top Layer w0.254: SB14.2 25.527,3.556 25.781,3.302 48.767,3.302 49.53,4.065 CN3.2 ; v1(30.48,25.273) 30.48,45.571 30.629,45.72 32.998,45.72 33.238,45.96 U1.13
  Bottom Layer w0.254: SB14.2 30.099,6.604 30.48,6.985 v1(30.48,25.273)
STLINK_TX: CN3.1 SB13.2 U1.12 | length 72.8
  Top Layer w0.254: v1(25.654,51.435) 25.654,52.705 26.21,53.261 U1.12 ; SB13.2 46.613,7.366 CN3.1
  Bottom Layer w0.254: v1(25.654,51.435) 25.654,26.797 26.035,26.416 36.068,26.416 36.322,26.162 SB13.2
STM_JTCK: SB6.2 U1.37 | length 99
  Top Layer w0.254: U1.37@38.862,60.138 38.862,62.97 39.011,63.119 v1(93.98,63.119) ; v1(96.266,63.119) 100.203,63.119 100.838,62.484 100.838,32.512 100.203,31.877 97.38,31.877 SB6.2
  Bottom Layer w0.254: v1(93.98,63.119) v1(96.266,63.119)
STM_JTMS: SB10.2 U1.34 | length 116.1
  Top Layer w0.254: U1.34@40.433,57.757 54.892,57.757 55.372,57.277 v1(55.372,56.388)
  Bottom Layer w0.254: v1(55.372,56.388) 55.372,22.479 55.88,21.971 75.184,21.971 75.565,21.59 75.565,3.683 75.946,3.302 96.901,3.302 97.38,3.781 97.38,9.046 97.282,9.144 97.38,9.242 SB10.2
T_JTCK: R8.2 SB3.1 U1.15 U1.26 | length 129.1
  Top Layer w0.254: U1.15 34.238,50.847 34.238,43.994 34.544,43.688 v1(36.449,43.688) ; v1(38.481,43.688) SB3.1 ; U1.26 45.15,53.761 ; 45.15,53.721 45.19,53.721 45.593,53.318 v1(45.593,52.07) ; 45.593,43.837 v1(45.593,46.609) ; R8.2 71.496,84.079 72.009,83.566 v2(74.295,83.566)
  Bottom Layer w0.254: v1(36.449,43.688) v1(38.481,43.688) ; v1(45.593,46.609) v1(45.593,52.07) ; v2(74.295,83.566) 80.772,83.566 81.407,82.931 81.407,52.07 82.042,51.435 84.836,51.435 85.471,50.8 SB3.1
T_JTDI: U1.17
T_JTDO: U1.16
T_JTMS: R9.2 R18.2 SB7.1 U1.27 | length 112.9
  Top Layer w0.254: U1.27@40.386,54.229 63.971,54.229 R18.2 64.153,54.083 67.926,54.083 v1(67.945,54.102) ; R9.2 71.247,80.076 71.247,78.74 71.501,78.486 v2(74.803,78.486)
  Bottom Layer w0.254: v1(67.945,54.102) 80.137,54.102 ; v2(74.803,78.486) 79.883,78.486 80.137,78.232 80.137,54.102 ; SB7.1 80.645,20.701 80.137,21.209 80.137,54.102
T_NRST: R10.2 SB1.1 U1.18 | length 116.3
  Top Layer w0.254: 35.703,50.982 35.703,48.371 36.195,47.879 94.615,47.879 95.123,48.387 SB1.1 95.123,85.725 94.615,86.233 R10.2
T_SWDIO_IN: R18.1 U1.25 | length 29.1
  Top Layer w0.254: U1.25@40.259,53.213 42.672,53.213 42.767,53.118 43.053,52.832 43.053,50.187 43.202,50.038 43.561,50.038 63.754,50.038 64.135,50.419 R18.1
T_SWO: R13.2 SB2.1 U1.31 | length 135.4
  Top Layer w0.254: R13.2 35.753,94.295 36.217,93.831 47.476,93.831 v1(47.498,93.853) ; U1.31@40.433,56.257 47.629,56.257 48.641,55.245 SB2.1
  Bottom Layer w0.254: v1(47.498,93.853) 62.865,93.853 63.627,93.091 84.836,93.091 85.598,92.329 SB2.1
U5V: CN6.1 D3.2 R12.1 | length 160.5
  Top Layer w0.254: CN6.1 15.752,102.467 15.901,102.616 29.337,102.616 29.591,102.362 29.591,82.677 29.972,82.296 34.417,82.296 34.785,81.928 R12.1 36.391,78.486 36.54,78.635 36.54,82.876 36.057,83.359 33.481,83.359 33.147,83.693 33.147,86.36 33.608,86.821 42.592,86.821 42.926,86.487 v1(42.926,78.486) ; D3.2 67.817,31.879 67.817,33.252 67.966,33.401 69.469,33.401 69.723,33.655 69.723,38.227 70.104,38.608 72.771,38.608 73.025,38.862 v1(73.025,39.878)
  Bottom Layer w0.254: v1(42.926,78.486) 42.926,77.216 43.561,76.581 49.149,76.581 49.657,77.089 49.657,78.994 50.383,79.72 66.33,79.72 66.802,79.248 66.802,50.419 67.437,49.784 72.263,49.784 73.025,49.022 v1(73.025,39.878)
USB_DM: R24.2 U1.32 | length 66.1
  Top Layer w0.254: R24.2 15.224,75.962 15.748,75.438 16.637,75.438 v2(16.764,75.311) ; U1.32@40.433,56.769 v1(48.768,56.769)
  Bottom Layer w0.254: v2(16.764,75.311) 16.891,75.438 21.695,75.438 21.844,75.289 21.844,71.501 22.479,70.866 41.402,70.866 42.291,69.977 42.291,59.309 42.926,58.674 50.546,58.674 50.8,58.42 50.8,57.15 50.419,56.769 v1(48.768,56.769)
USB_DP: R23.2 U1.33 | length 39.3
  Top Layer w0.254: R23.2 20.304,61.484 20.701,61.087 32.385,61.087 32.707,60.765 32.707,59.119 32.869,58.958 32.869,58.699 34.306,57.261 U1.33@40.513,57.261
USB_RENUMn: R27.2 U1.38 | length 47.1
  Top Layer w0.254: U1.38@38.354,60.138 38.354,63.373 38.835,63.854 76.046,63.854 76.454,64.262 R27.2
pads on no net: U1.4 U1.11 U1.14 U1.19 U1.22 U1.40 U1.41 U1.42 U1.43 U1.45 U1.46

## Other copper
Top Layer:
  rectangle net GND: 0,0.127 110.617,103.378

## Silkscreen, mask and mechanical layers (free items; w line width, h text height)
Mechanical 1:
  the board outline again, w0.254